# EAGLE board rotary-encoder-breakout-mk-2.0 (EAGLE 6.5.0)
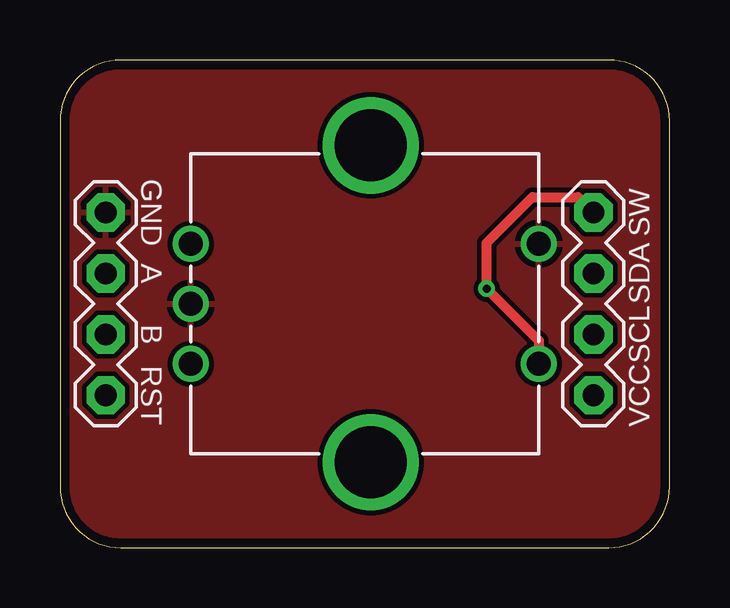
[diagram p0: board, top side]
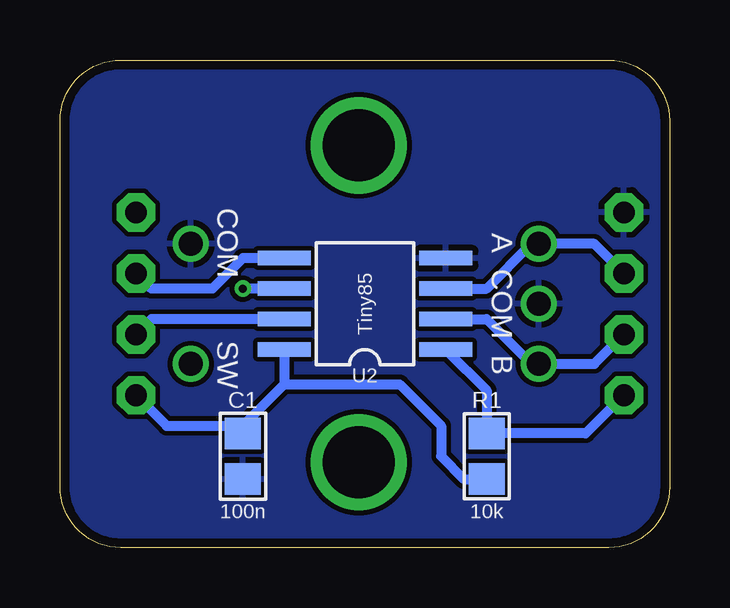
[diagram p1: board, bottom side, seen from below]

Size 25.4 x 20.32 mm. Coordinates in mm from the lower left corner, seen from the top.
Outline: 0,17.78 0,2.54 arc90 2.54,0 22.86,0 arc90 25.4,2.54 25.4,17.78 arc90 22.86,20.32 2.54,20.32 arc90 0,17.78
Copper layers (1*16): Top 0.0356mm / dielectric 1.5011mm / Bottom 0.0356mm
Design rules "LaenPCBOrder2": minimum track width 6mil, minimum drill 13mil, track to track 6mil, track to pad 6mil, pad to pad 6mil, via to via 6mil, smd to smd 6mil, copper to edge 15mil, drill to drill 6mil, minimum pad ring 7mil, minimum via ring 7mil, stop-mask expansion 3mil, vias tented up to drill 20mil, thermal gap 10mil

## Footprints (pad centres in the part's own frame; a part is rotated, then mirrored left to right if it is on the bottom)
C0805 = smd 1.3 x 1.5: 1 -0.95,0; 2 0.95,0
1X04-PTH-VERT = drill 0.9 pad 1.6 octagon: 1 0,0; 2 2.54,0; 3 5.08,0; 4 7.62,0
R0805 = smd 1.3 x 1.5: 1 -0.95,0; 2 0.95,0
ROTARY_ENCODER_SWITCH = drill 1 pad 1.5: A 7.25,-2.5; B 7.25,2.5; C 7.25,0; SW1 -7.25,2.5; SW2 -7.25,-2.5 | drill 3: P$6 -0.25,6.6; P$7 -0.25,-6.6
SO08-EIAJ = smd 0.61 x 2.21: 1 -1.905,-3.378; 2 -0.635,-3.378; 3 0.635,-3.378; 4 1.905,-3.378; 5 1.905,3.353; 6 0.635,3.353; 7 -0.635,3.353; 8 -1.905,3.353

## Placement (x,y rotation side)
C1  100n  [C0805]  17.78,3.81 270 bottom
FRAME1  FRAME-LETTERNO_PACKAGE  [DUMMY]  0,0 0 top
JP1  M04PTH  [1X04-PTH-VERT]  1.91,6.35 90 top
JP2  M04PTH  [1X04-PTH-VERT]  22.23,6.35 90 top
R1  10k  [R0805]  7.62,3.81 270 bottom
U1  ROTARY_ENCODER_SWITCH  [ROTARY_ENCODER_SWITCH]  12.7,10.16 180 top
U2  Tiny85  [SO08-EIAJ]  12.7,10.16 90 bottom

## Library data of the parts
C1 JP1 JP2 R1 U1 = A_butts
FRAME1 = A_butts; DESIGNER: sean@yak.net; VERSION: 1.0
U2 = A_butts; PROD_ID: IC-09092

## Nets
A: JP1.3 U1.A U2.3
B: JP1.2 U1.B U2.2
GND: C1.2 JP1.4 U1.C U1.SW2 U2.4
MOSI/SDA: JP2.3 U2.5
RST: JP1.1 R1.1 U2.1
SCK/SCL: JP2.2 U2.7
SW: JP2.4 U1.SW1 U2.6
VCC: C1.1 JP2.1 R1.2 U2.8

## Tracks (layer width: path | path; a pad name or v marks a point on that pad's centre or on a via)
A
  Bottom 0.406: JP1.3 3.13,12.66 U1.A 5.75,12.66 7.62,10.79 U2.3
B
  Bottom 0.406: U2.2 7.62,9.53 5.71,7.62 5.49,7.62 U1.B 3.13,7.66 JP1.2
GND
  pour Bottom (isolate 0.2): 0,0 0,20.32 25.4,20.32 25.4,0
  pour Top (isolate 0.2): 0,0 0,20.32 25.4,20.32 25.4,0
MOSI/SDA
  Bottom 0.406: U2.5 17.78,12.06 19.05,10.79 21.59,10.79 JP2.3
RST
  Bottom 0.406: U2.1 7.62,6.55 R1.1 3.5,4.76 JP1.1
SCK/SCL
  Bottom 0.406: U2.7 21.59,9.53 JP2.2
SW  (via drill 0.33)
  Top 0.406: U1.SW1 19.95,8.62 v17.78,10.79 17.78,12.7 19.68,14.61 21.59,14.61 JP2.4
  Bottom 0.406: U2.6 v17.78,10.79
VCC
  Bottom 0.406: JP2.1 20.95,5.08 17.78,5.08 | 17.78,5.08 C1.1 | U2.8 16.05,6.81 | 16.05,6.81 17.78,5.08 | 16.05,6.81 11.25,6.81 9.53,5.08 9.53,3.81 8.57,2.86 R1.2

## Text on the board
tPlace: GND | SW | A | SDA | B | SCL | RST | VCC
bPlace: A | COM | COM | B | SW